# EAGLE board SISTEM MINIMUM ATMEGA16 trace 2 (EAGLE 5.06)
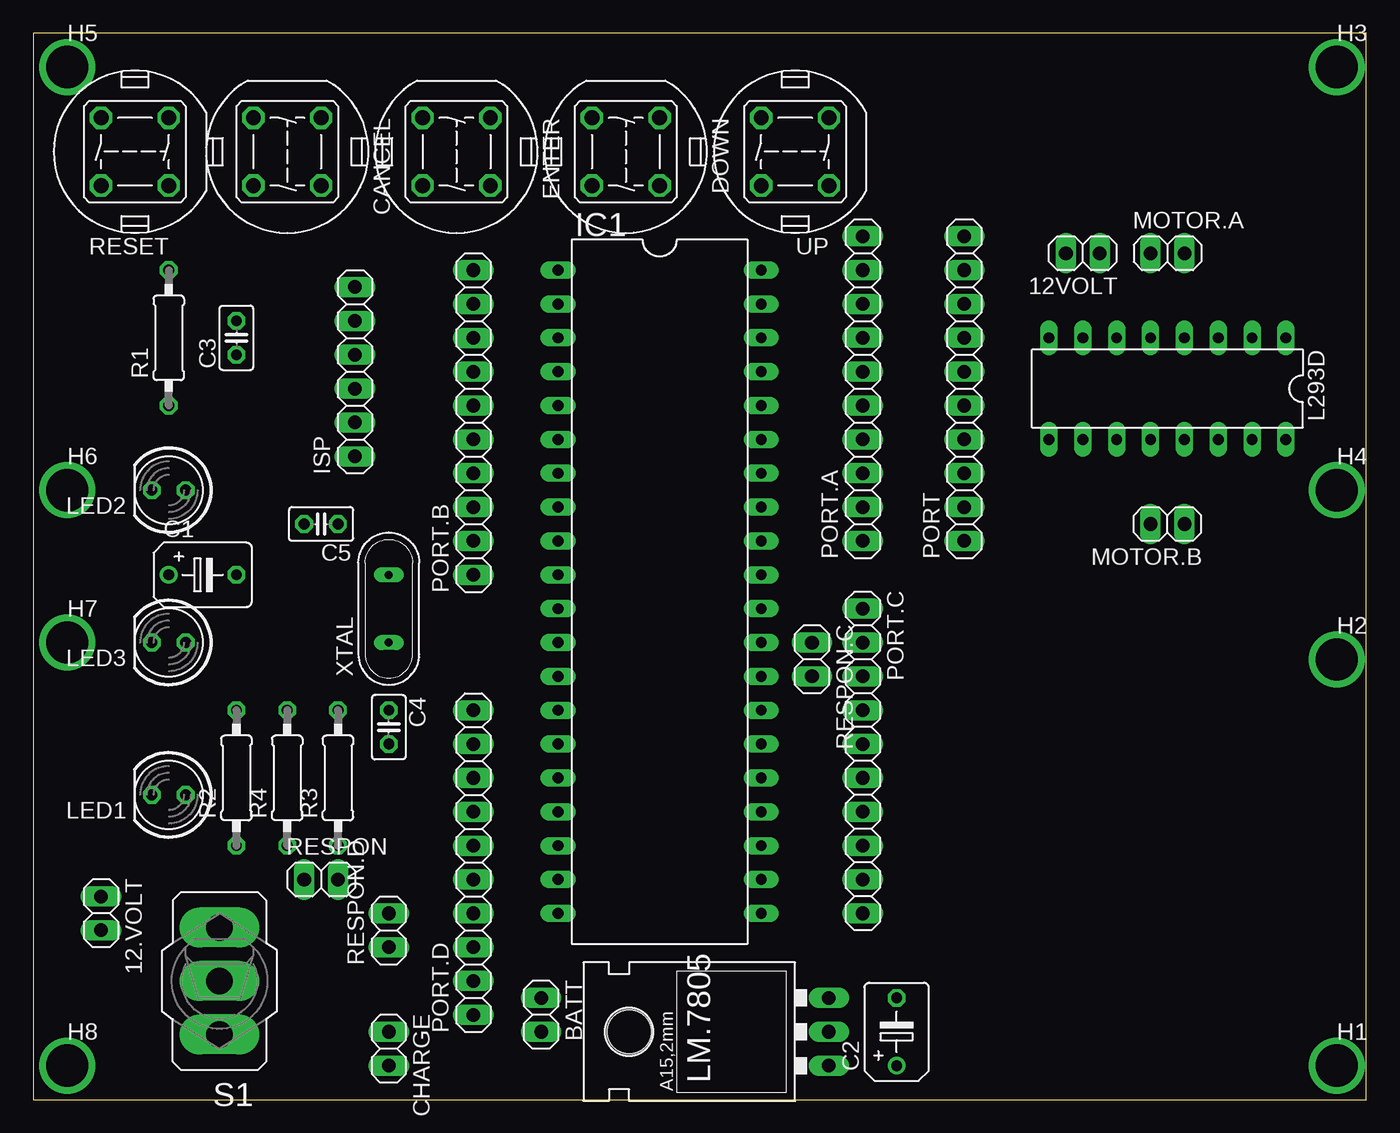
[diagram p0: board, top side]
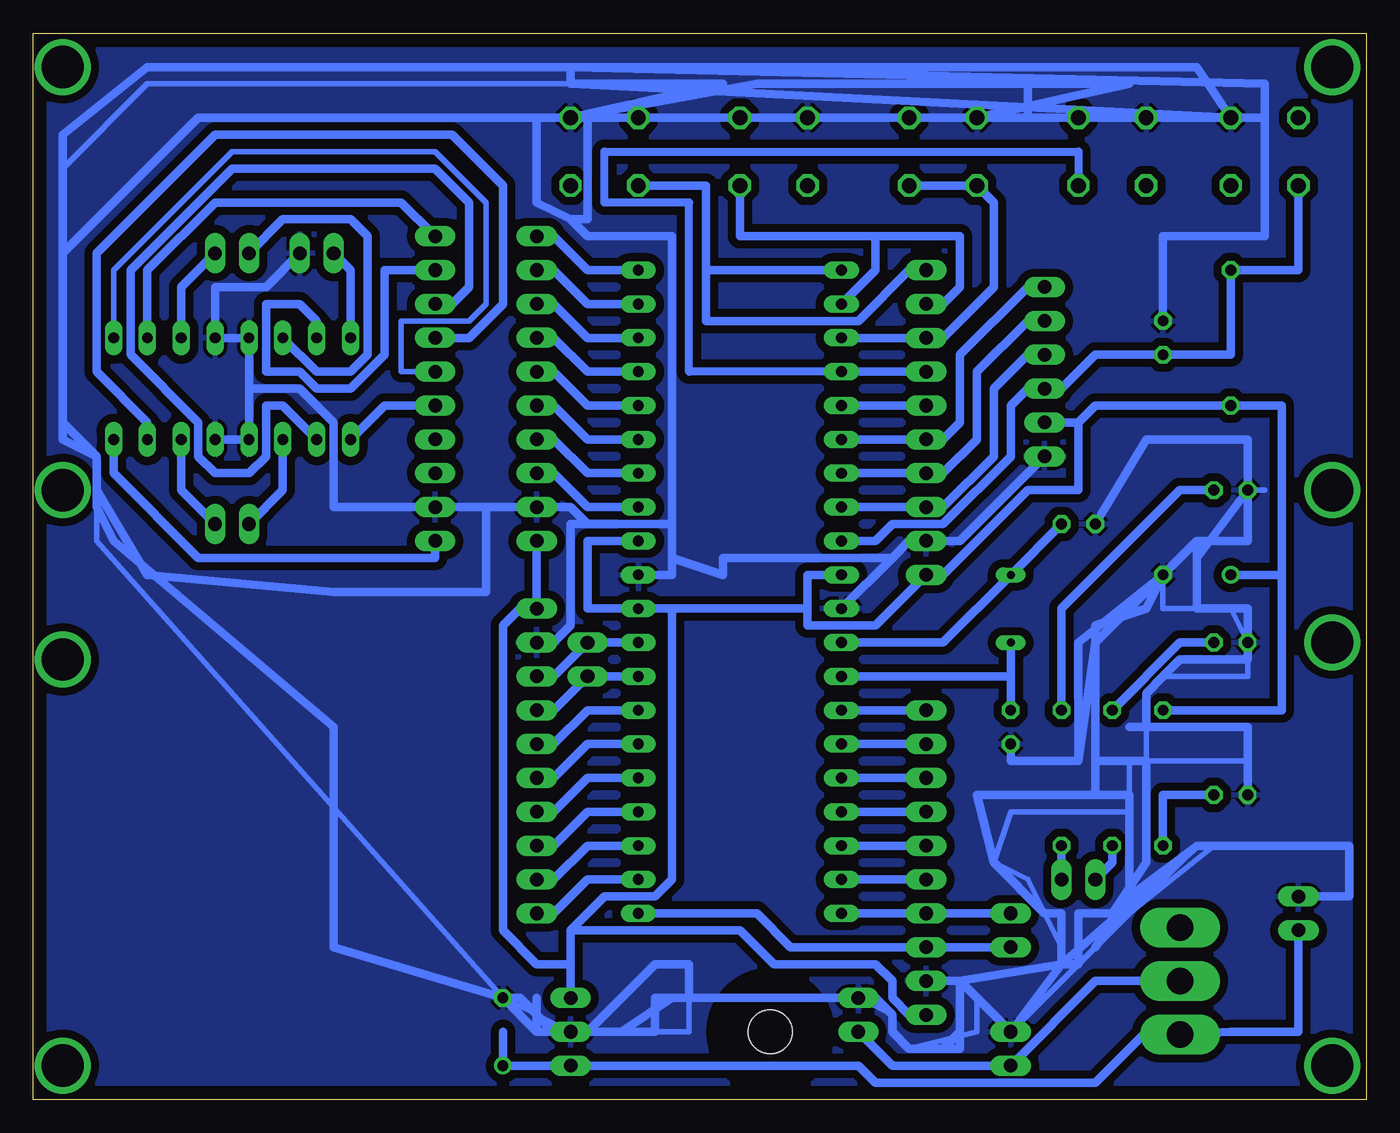
[diagram p1: board, bottom side, seen from below]

Size 100 x 80 mm. Coordinates in mm from the lower left corner, seen from the top.
Outline: 0,0 100,0 100,80 0,80 0,0
Copper layers (1*16): Top 0.035mm / dielectric 1.5mm / Bottom 0.035mm
Design rules "default *": minimum track width 25mil, minimum drill 24mil, track to track 10mil, track to pad 10mil, pad to pad 10mil, via to via 10mil, smd to smd 8mil, copper to edge 40mil, drill to drill 8mil, minimum pad ring 10mil, minimum via ring 8mil, stop-mask expansion 4mil, vias tented up to drill 0mil, thermal gap 10mil

## Footprints (pad centres in the part's own frame; a part is rotated, then mirrored left to right if it is on the bottom)
1X02 = drill 1.016 long: 1 -1.27,0; 2 1.27,0
B45181B = drill 0.813 round: + -2.54,0 | drill 0.813 octagon: - 2.54,0
C025-025X050 = drill 0.813 octagon: 1 -1.27,0; 2 1.27,0
DTE6 = drill 1.118 octagon: 1 -2.54,2.54; 2 2.54,2.54; 3 2.54,-2.54; 4 -2.54,-2.54
PAD_0.1250 = drill 3.175 pad 3.175 round: 1 0,0
DIL40 = drill 0.813 long: 1 -24.13,-7.62; 2 -21.59,-7.62; 3 -19.05,-7.62; 4 -16.51,-7.62; 5 -13.97,-7.62; 6 -11.43,-7.62; 7 -8.89,-7.62; 8 -6.35,-7.62; 9 -3.81,-7.62; 10 -1.27,-7.62; 11 1.27,-7.62; 12 3.81,-7.62; 13 6.35,-7.62; 14 8.89,-7.62; 15 11.43,-7.62; 16 13.97,-7.62; 17 16.51,-7.62; 18 19.05,-7.62; 19 21.59,-7.62; 20 24.13,-7.62; 21 24.13,7.62; 22 21.59,7.62; 23 19.05,7.62; 24 16.51,7.62; 25 13.97,7.62; 26 11.43,7.62; 27 8.89,7.62; 28 6.35,7.62; 29 3.81,7.62; 30 1.27,7.62; 31 -1.27,7.62; 32 -3.81,7.62; 33 -6.35,7.62; 34 -8.89,7.62; 35 -11.43,7.62; 36 -13.97,7.62; 37 -16.51,7.62; 38 -19.05,7.62; 39 -21.59,7.62; 40 -24.13,7.62
1X06 = drill 1.016 long: 1 -6.35,0; 2 -3.81,0; 3 -1.27,0; 4 1.27,0; 5 3.81,0; 6 6.35,0
DIL16 = drill 0.813 long: 1 -8.89,-3.81; 2 -6.35,-3.81; 3 -3.81,-3.81; 4 -1.27,-3.81; 5 1.27,-3.81; 6 3.81,-3.81; 7 6.35,-3.81; 8 8.89,-3.81; 9 8.89,3.81; 10 6.35,3.81; 11 3.81,3.81; 12 1.27,3.81; 13 -1.27,3.81; 14 -3.81,3.81; 15 -6.35,3.81; 16 -8.89,3.81
LED5MM = drill 0.813 octagon: A -1.27,0; K 1.27,0
78XXL = drill 1.016 long: GND 0,-3.81; IN -2.54,-3.81; OUT 2.54,-3.81 | hole 3.302: 0,11.176
1X10 = drill 1.016 long: 1 -11.43,0; 2 -8.89,0; 3 -6.35,0; 4 -3.81,0; 5 -1.27,0; 6 1.27,0; 7 3.81,0; 8 6.35,0; 9 8.89,0; 10 11.43,0
0207/10 = drill 0.813 octagon: 1 -5.08,0; 2 5.08,0
320-916 = drill 2.007 long: 1 0,4.013; 2 0,0; 3 0,-4.013
QS = drill 0.61 long: 1 -2.54,0; 2 2.54,0

## Placement (x,y rotation side)
12.VOLT  [1X02]  5.08,13.97 270 top
12VOLT  [1X02]  78.74,63.5 180 top
BATT  [1X02]  38.1,6.35 270 top
C1  [B45181B]  12.7,39.37 0 top
C2  [B45181B]  64.77,5.08 90 top
C3  [C025-025X050]  15.24,57.15 90 top
C4  [C025-025X050]  26.67,27.94 270 top
C5  [C025-025X050]  21.59,43.18 180 top
CANCEL  [DTE6]  19.05,71.12 270 top
CHARGE  [1X02]  26.67,3.81 270 top
DOWN  [DTE6]  44.45,71.12 270 top
ENTER  [DTE6]  31.75,71.12 270 top
H1  SPECIAL_DRILL_0.1250  [PAD_0.1250]  97.79,2.54 0 top
H2  SPECIAL_DRILL_0.1250  [PAD_0.1250]  97.79,33.02 0 top
H3  SPECIAL_DRILL_0.1250  [PAD_0.1250]  97.79,77.47 0 top
H4  SPECIAL_DRILL_0.1250  [PAD_0.1250]  97.79,45.72 0 top
H5  SPECIAL_DRILL_0.1250  [PAD_0.1250]  2.54,77.47 0 top
H6  SPECIAL_DRILL_0.1250  [PAD_0.1250]  2.54,45.72 0 top
H7  SPECIAL_DRILL_0.1250  [PAD_0.1250]  2.54,34.29 0 top
H8  SPECIAL_DRILL_0.1250  [PAD_0.1250]  2.54,2.54 0 top
IC1  MEGA16  [DIL40]  46.99,38.1 270 top
ISP  [1X06]  24.13,54.61 90 top
L293D  [DIL16]  85.09,53.34 180 top
LED1  [LED5MM]  10.16,22.86 180 top
LED2  [LED5MM]  10.16,45.72 180 top
LED3  [LED5MM]  10.16,34.29 180 top
LM.7805  [78XXL]  55.88,5.08 90 top
MOTOR.A  [1X02]  85.09,63.5 0 top
MOTOR.B  [1X02]  85.09,43.18 180 top
PORT  [1X10]  69.85,53.34 90 top
PORT.A  [1X10]  62.23,53.34 90 top
PORT.B  [1X10]  33.02,50.8 90 top
PORT.C  [1X10]  62.23,25.4 270 top
PORT.D  [1X10]  33.02,17.78 90 top
R1  [0207/10]  10.16,57.15 90 top
R2  [0207/10]  15.24,24.13 90 top
R3  [0207/10]  22.86,24.13 90 top
R4  [0207/10]  19.05,24.13 90 top
RESET  [DTE6]  7.62,71.12 180 top
RESPON  [1X02]  21.59,16.51 0 top
RESPON.C  [1X02]  58.42,33.02 270 top
RESPON.D  [1X02]  26.67,12.7 90 top
S1  [320-916]  13.97,8.89 180 top
UP  [DTE6]  57.15,71.12 180 top
XTAL  [QS]  26.67,36.83 90 top

## Library data of the parts
12.VOLT 12VOLT BATT CHARGE ISP MOTOR.A MOTOR.B PORT PORT.A PORT.B PORT.C PORT.D RESPON RESPON.C RESPON.D = pinhead
C1-C5 R1-R4 = resistor
CANCEL DOWN ENTER RESET UP = switch-misc
H1-H8 = special-drill
IC1 = atmel
L293D = ic-package
LED1-LED3 = led
LM.7805 = v-reg
S1 = switch
XTAL = special

## Nets
GND: 12.VOLT.1 12VOLT.1 BATT.1 C1.- C2.- C3.2 C4.2 C5.2 CANCEL.4 CHARGE.1 DOWN.4 ENTER.4 IC1.11 IC1.31 ISP.1 L293D.4 L293D.5 L293D.12 L293D.13 LED1.K LED2.K LED3.K LM.7805.GND PORT.2 PORT.A.2 PORT.B.2 PORT.C.2 PORT.D.2 RESET.4 UP.4
N$2: IC1.23 PORT.C.9
N$3: 12.VOLT.2 S1.1
N$4: BATT.2 CHARGE.2 S1.2
N$5: DOWN.2 IC1.2 PORT.B.9
N$6: LED1.A R2.1
N$7: C4.1 IC1.13 XTAL.1
N$8: C5.1 IC1.12 XTAL.2
N$9: C3.1 IC1.9 ISP.3 R1.2 RESET.2
N$10: IC1.24 PORT.C.8
N$11: IC1.22 PORT.C.10
N$12: IC1.40 PORT.A.10
N$13: IC1.39 PORT.A.9
N$14: IC1.38 PORT.A.8
N$15: IC1.37 PORT.A.7
N$16: IC1.36 PORT.A.6
N$17: IC1.35 PORT.A.5
N$18: IC1.34 PORT.A.4
N$19: IC1.33 PORT.A.3
N$20: IC1.1 PORT.B.10 UP.2
N$21: L293D.6 MOTOR.A.1
N$22: L293D.3 MOTOR.A.2
N$23: L293D.11 MOTOR.B.2
N$24: IC1.5 PORT.B.6
N$25: IC1.7 ISP.5 PORT.B.4
N$26: IC1.8 ISP.4 PORT.B.3
N$27: IC1.6 ISP.6 PORT.B.5
N$28: IC1.29 PORT.C.3 RESPON.C.1
N$29: IC1.28 PORT.C.4 RESPON.C.2
N$30: IC1.27 PORT.C.5
N$31: IC1.26 PORT.C.6
N$32: CANCEL.2 IC1.4 PORT.B.7
N$33: IC1.25 PORT.C.7
N$34: L293D.14 MOTOR.B.1
N$35: L293D.1 PORT.6
N$36: IC1.21 PORT.D.3 RESPON.D.1
N$37: IC1.20 PORT.D.4 RESPON.D.2
N$38: IC1.19 PORT.D.5
N$39: IC1.18 PORT.D.6
N$40: IC1.17 PORT.D.7
N$41: IC1.16 PORT.D.8
N$42: IC1.15 PORT.D.9
N$43: IC1.14 PORT.D.10
N$44: L293D.9 PORT.5
N$45: ENTER.2 IC1.3 PORT.B.8
N$46: LED2.A R3.2
N$47: L293D.2 PORT.10
N$48: L293D.7 PORT.9
N$49: L293D.10 PORT.8
N$50: L293D.15 PORT.7
N$51: L293D.16 PORT.1
N$52: 12VOLT.2 L293D.8
N$53: LED3.A R4.2
N$54: R3.1 RESPON.2
N$55: R4.1 RESPON.1
S$2: C2.+ LM.7805.IN
UP: C1.+ IC1.10 IC1.30 IC1.32 ISP.2 LM.7805.OUT PORT.A.1 PORT.B.1 PORT.C.1 PORT.D.1 R1.1 R2.2

## Tracks (layer width: path | path; a pad name or v marks a point on that pad's centre or on a via)
GND
  Bottom 0.406: LED2.K 7.62,45.72 | C1.- 15.24,36.83 10.16,36.83 LED3.K 8.89,31.75 15.24,31.75 | 16.51,30.48 16.51,25.4 8.89,25.4 17.78,25.4 17.78,21.59 26.67,21.59 27.94,17.78 25.4,16.51 22.86,11.43 | 1.27,19.05 11.43,19.05 17.78,13.97 12.7,19.05 20.32,11.43 CHARGE.1 29.21,7.62 29.21,5.08 34.29,3.81 | 35.56,6.35 BATT.1 | 50.8,7.62 50.8,5.08 LM.7805.GND C2.- 95.25,41.91 95.25,48.26 | 59.69,76.2 91.44,76.2 97.79,69.85 97.79,50.8
  Bottom 0.635: 16.51,27.94 16.51,30.48 15.24,31.75 13.97,33.02 8.89,33.02 LED3.K 8.89,36.83 10.16,36.83 12.7,36.83 12.7,40.64 | 16.51,27.94 17.78,27.94 | 16.51,27.94 8.89,27.94 8.89,25.4 LED1.K | 12.7,41.91 12.7,40.64 | 12.7,40.64 LED2.K | 7.62,64.77 7.62,73.66 RESET.4 | 7.62,64.77 7.62,76.2 59.69,77.47 59.69,76.2 | UP.4 RESET.4 | 59.69,66.04 58.42,66.04 58.42,73.66 RESET.4 | RESET.4 ENTER.4 | RESET.4 CANCEL.4 | DOWN.4 25.4,73.66 25.4,76.2 | 25.4,76.2 17.78,76.2 ENTER.4 | UP.4 45.72,76.2 25.4,76.2 | C3.2 15.24,64.77 7.62,64.77 | 21.59,25.4 21.59,34.29 C1.- | C1.- 12.7,41.91 | 12.7,41.91 8.89,41.91 LED2.K | LED2.K 8.89,49.53 16.51,49.53 C5.2 | 12.7,19.05 11.43,19.05 | 12.7,19.05 22.86,10.16 | 22.86,10.16 CHARGE.1 30.48,8.89 | 30.48,8.89 PORT.D.2 | 20.32,34.29 21.59,25.4 | 21.59,25.4 26.67,25.4 C4.2 | 20.32,22.86 17.78,22.86 17.78,21.59 17.78,15.24 | 12.VOLT.1 1.27,15.24 1.27,19.05 12.7,19.05 | 12.7,19.05 17.78,15.24 | 17.78,15.24 20.32,11.43 | 20.32,34.29 C1.- | 20.32,34.29 20.32,25.4 17.78,25.4 16.51,25.4 16.51,17.78 19.05,13.97 21.59,13.97 21.59,10.16 22.86,10.16 | 50.8,7.62 53.34,7.62 53.34,5.08 LM.7805.GND | 62.23,5.08 62.23,7.62 | 50.8,7.62 50.8,10.16 53.34,10.16 58.42,5.08 LM.7805.GND | C2.- 63.5,7.62 60.96,5.08 LM.7805.GND | 35.56,40.64 34.29,41.91 PORT.B.2 30.48,41.91 ISP.1 | 35.56,40.64 IC1.11 | L293D.13 L293D.12 83.82,53.34 | 12VOLT.1 82.55,60.96 86.36,60.96 L293D.4 L293D.5 83.82,53.34 | PORT.C.2 60.96,34.29 59.69,35.56 59.69,43.18 52.07,43.18 | 52.07,43.18 52.07,39.37 IC1.31 | 66.04,44.45 PORT.A.2 59.69,44.45 58.42,43.18 52.07,43.18 | 66.04,44.45 PORT.2 77.47,44.45 77.47,50.8 80.01,53.34 83.82,53.34 | 35.56,40.64 48.26,40.64 48.26,39.37 52.07,40.64 52.07,43.18
  Bottom 0.635: C1.- 16.51,36.83 20.32,35.56 20.32,34.29 | 20.32,22.86 20.32,34.29 | 20.32,22.86 29.21,22.86 27.94,17.78 24.13,13.97 22.86,13.97 22.86,11.43 22.86,10.16 | 22.86,10.16 30.48,8.89 | 30.48,8.89 30.48,3.81 34.29,3.81 | 50.8,7.62 BATT.1 36.83,7.62 35.56,6.35 35.56,5.08 34.29,3.81 | 50.8,7.62 52.07,7.62 55.88,5.08 LM.7805.GND | LM.7805.GND 62.23,5.08 | 62.23,5.08 C2.- | C2.- 77.47,11.43 77.47,27.94 93.98,41.91 95.25,44.45 95.25,48.26 | 95.25,48.26 97.79,50.8 97.79,72.39 91.44,77.47 12.7,77.47 RESET.4 | RESET.4 ENTER.4 | UP.4 ENTER.4 | UP.4 87.63,73.66 97.79,63.5 97.79,49.53 95.25,48.26 | 95.25,48.26 95.25,45.72 91.44,39.37 77.47,38.1 66.04,38.1 66.04,44.45 | 30.48,8.89 30.48,5.08 31.75,3.81 34.29,3.81 | UP.4 48.26,76.2 59.69,76.2 | 52.07,43.18 52.07,64.77 58.42,64.77 59.69,66.04 | UP.4 62.23,73.66 62.23,67.31 59.69,66.04 | UP.4 RESET.4 | 59.69,76.2 RESET.4
  pour Bottom (isolate 0.61): 0,80.01 100.33,80.01 100.33,0 0,0
N$2
  Bottom 0.635: IC1.23 58.42,19.05 60.96,16.51 PORT.C.9
N$3
  Bottom 0.635: 12.VOLT.2 5.08,5.08 10.16,5.08 S1.1 16.51,5.08 20.32,1.27 36.83,1.27 38.1,2.54 59.69,2.54
N$4
  Bottom 0.635: BATT.2 35.56,2.54 CHARGE.2 20.32,8.89 S1.2 12.7,8.89
N$5
  Bottom 0.635: IC1.2 36.83,62.23 36.83,64.77 | PORT.B.9 31.75,59.69 30.48,60.96 30.48,64.77 36.83,64.77 | 36.83,64.77 46.99,64.77 DOWN.2
N$6
  Bottom 0.635: LED1.A 15.24,22.86 R2.1
N$7
  Bottom 0.635: 26.67,31.75 IC1.13 | C4.1 26.67,31.75 | 26.67,31.75 XTAL.1
N$8
  Bottom 0.635: C5.1 XTAL.2 31.75,34.29 IC1.12
N$9
  Bottom 0.61: ISP.3 25.4,53.34
  Bottom 0.635: 22.86,53.34 ISP.3 | IC1.9 36.83,41.91 35.56,43.18 31.75,43.18 26.67,48.26 26.67,52.07 25.4,53.34 22.86,53.34 | 20.32,55.88 22.86,53.34 | 10.16,55.88 20.32,55.88 | 10.16,55.88 R1.2 5.08,62.23 RESET.2 | 20.32,55.88 C3.1 10.16,55.88
N$10
  Bottom 0.635: IC1.24 58.42,21.59 60.96,19.05 PORT.C.8
N$11
  Bottom 0.635: IC1.22 58.42,16.51 60.96,13.97 PORT.C.10
N$12
  Bottom 0.635: IC1.40 58.42,62.23 60.96,64.77 PORT.A.10
N$13
  Bottom 0.635: IC1.39 58.42,59.69 60.96,62.23 PORT.A.9
N$14
  Bottom 0.635: IC1.38 58.42,57.15 60.96,59.69 PORT.A.8
N$15
  Bottom 0.635: IC1.37 58.42,54.61 60.96,57.15 PORT.A.7
N$16
  Bottom 0.635: IC1.36 58.42,52.07 60.96,54.61 PORT.A.6
N$17
  Bottom 0.635: IC1.35 58.42,49.53 60.96,52.07 PORT.A.5
N$18
  Bottom 0.635: IC1.34 58.42,46.99 60.96,49.53 PORT.A.4
N$19
  Bottom 0.635: IC1.33 58.42,44.45 60.96,46.99 PORT.A.3
N$20
  Bottom 0.635: 49.53,62.23 IC1.1 | PORT.B.10 34.29,62.23 38.1,58.42 49.53,58.42 49.53,62.23 | 49.53,62.23 49.53,68.58 UP.2
N$21
  Bottom 0.635: L293D.6 78.74,54.61 76.2,54.61 74.93,55.88 74.93,64.77 76.2,66.04 81.28,66.04 MOTOR.A.1
N$22
  Bottom 0.635: L293D.3 88.9,60.96 MOTOR.A.2
N$23
  Bottom 0.635: L293D.11 81.28,45.72 MOTOR.B.2
N$24
  Bottom 0.635: PORT.B.6 IC1.5
N$25
  Bottom 0.635: IC1.7 PORT.B.4 31.75,46.99 29.21,49.53 29.21,54.61 25.4,58.42 ISP.5
N$26
  Bottom 0.635: IC1.8 PORT.B.3 31.75,44.45 27.94,48.26 27.94,53.34 25.4,55.88 ISP.4
N$27
  Bottom 0.635: IC1.6 PORT.B.5 31.75,49.53 30.48,50.8 30.48,55.88 25.4,60.96 ISP.6
N$28
  Bottom 0.635: IC1.29 RESPON.C.1 60.96,31.75 PORT.C.3
N$29
  Bottom 0.635: IC1.28 RESPON.C.2 60.96,29.21 PORT.C.4
N$30
  Bottom 0.635: IC1.27 58.42,29.21 60.96,26.67 PORT.C.5
N$31
  Bottom 0.635: IC1.26 58.42,26.67 60.96,24.13 PORT.C.6
N$32
  Bottom 0.61: IC1.4 50.8,54.61 50.8,67.31 57.15,67.31 57.15,71.12 21.59,71.12 CANCEL.2
  Bottom 0.635: PORT.B.7 IC1.4
N$33
  Bottom 0.635: IC1.25 58.42,24.13 60.96,21.59 PORT.C.7
N$34
  Bottom 0.635: L293D.14 88.9,45.72 MOTOR.B.1
N$35
  Bottom 0.406: L293D.1 93.98,62.23 85.09,71.12 69.85,71.12 66.04,67.31 66.04,59.69 67.31,58.42 72.39,58.42 72.39,54.61 PORT.6
N$36
  Bottom 0.635: IC1.21 45.72,13.97 43.18,11.43 PORT.D.3 RESPON.D.1
N$37
  Bottom 0.635: IC1.20 PORT.D.4 RESPON.D.2
N$38
  Bottom 0.635: PORT.D.5 IC1.19
N$39
  Bottom 0.635: PORT.D.6 IC1.18
N$40
  Bottom 0.635: PORT.D.7 IC1.17
N$41
  Bottom 0.635: PORT.D.8 IC1.16
N$42
  Bottom 0.635: PORT.D.9 IC1.15
N$43
  Bottom 0.635: PORT.D.10 IC1.14
N$44
  Bottom 0.635: L293D.9 73.66,52.07 PORT.5
N$45
  Bottom 0.635: IC1.3 PORT.B.8 31.75,57.15 27.94,60.96 27.94,67.31 29.21,68.58 ENTER.2
N$46
  Bottom 0.635: R3.2 22.86,36.83 13.97,45.72 LED2.A
N$47
  Bottom 0.635: L293D.2 91.44,62.23 86.36,67.31 72.39,67.31 PORT.10
N$48
  Bottom 0.635: L293D.7 78.74,58.42 80.01,59.69 82.55,59.69 82.55,54.61 80.01,54.61 78.74,53.34 76.2,53.34 73.66,55.88 73.66,62.23 PORT.9
N$49
  Bottom 0.635: L293D.10 81.28,52.07 82.55,52.07 82.55,48.26 83.82,46.99 86.36,46.99 87.63,48.26 87.63,50.8 92.71,55.88 92.71,62.23 85.09,69.85 69.85,69.85 67.31,67.31 67.31,60.96 68.58,59.69 PORT.8
N$50
  Bottom 0.635: L293D.15 91.44,50.8 95.25,54.61 95.25,63.5 86.36,72.39 68.58,72.39 64.77,68.58 64.77,59.69 67.31,57.15 PORT.7
N$51
  Bottom 0.635: L293D.16 93.98,46.99 87.63,40.64 69.85,40.64 PORT.1
N$52
  Bottom 0.635: L293D.8 76.2,62.23 12VOLT.2
N$53
  Bottom 0.635: R4.2 13.97,34.29 LED3.A
N$54
  Bottom 0.635: RESPON.2 R3.1
N$55
  Bottom 0.635: R4.1 19.05,17.78 RESPON.1
S$2
  Bottom 0.61: LM.7805.IN 38.1,2.54 36.83,1.27 20.32,1.27 16.51,5.08 15.24,5.08
  Bottom 0.635: 64.77,5.08 C2.+ LM.7805.IN
UP
  Bottom 0.635: PORT.A.1 PORT.C.1 63.5,36.83 64.77,35.56 64.77,12.7 62.23,10.16 59.69,10.16 LM.7805.OUT 59.69,12.7 | PORT.D.1 34.29,6.35 35.56,7.62 35.56,8.89 36.83,10.16 44.45,10.16 46.99,12.7 59.69,12.7 | 41.91,36.83 52.07,36.83 | 52.07,36.83 58.42,36.83 58.42,41.91 IC1.32 | 52.07,36.83 IC1.30 | 41.91,36.83 41.91,39.37 IC1.10 | R2.2 6.35,29.21 6.35,39.37 | 21.59,50.8 ISP.2 | 21.59,50.8 21.59,45.72 25.4,45.72 31.75,39.37 PORT.B.1 36.83,35.56 41.91,35.56 41.91,36.83 | 6.35,39.37 6.35,52.07 R1.1 20.32,52.07 21.59,50.8 | 6.35,39.37 C1.+ | 59.69,12.7 57.15,15.24 53.34,15.24 52.07,16.51 52.07,36.83